# EAGLE board v3 (EAGLE 5.11)
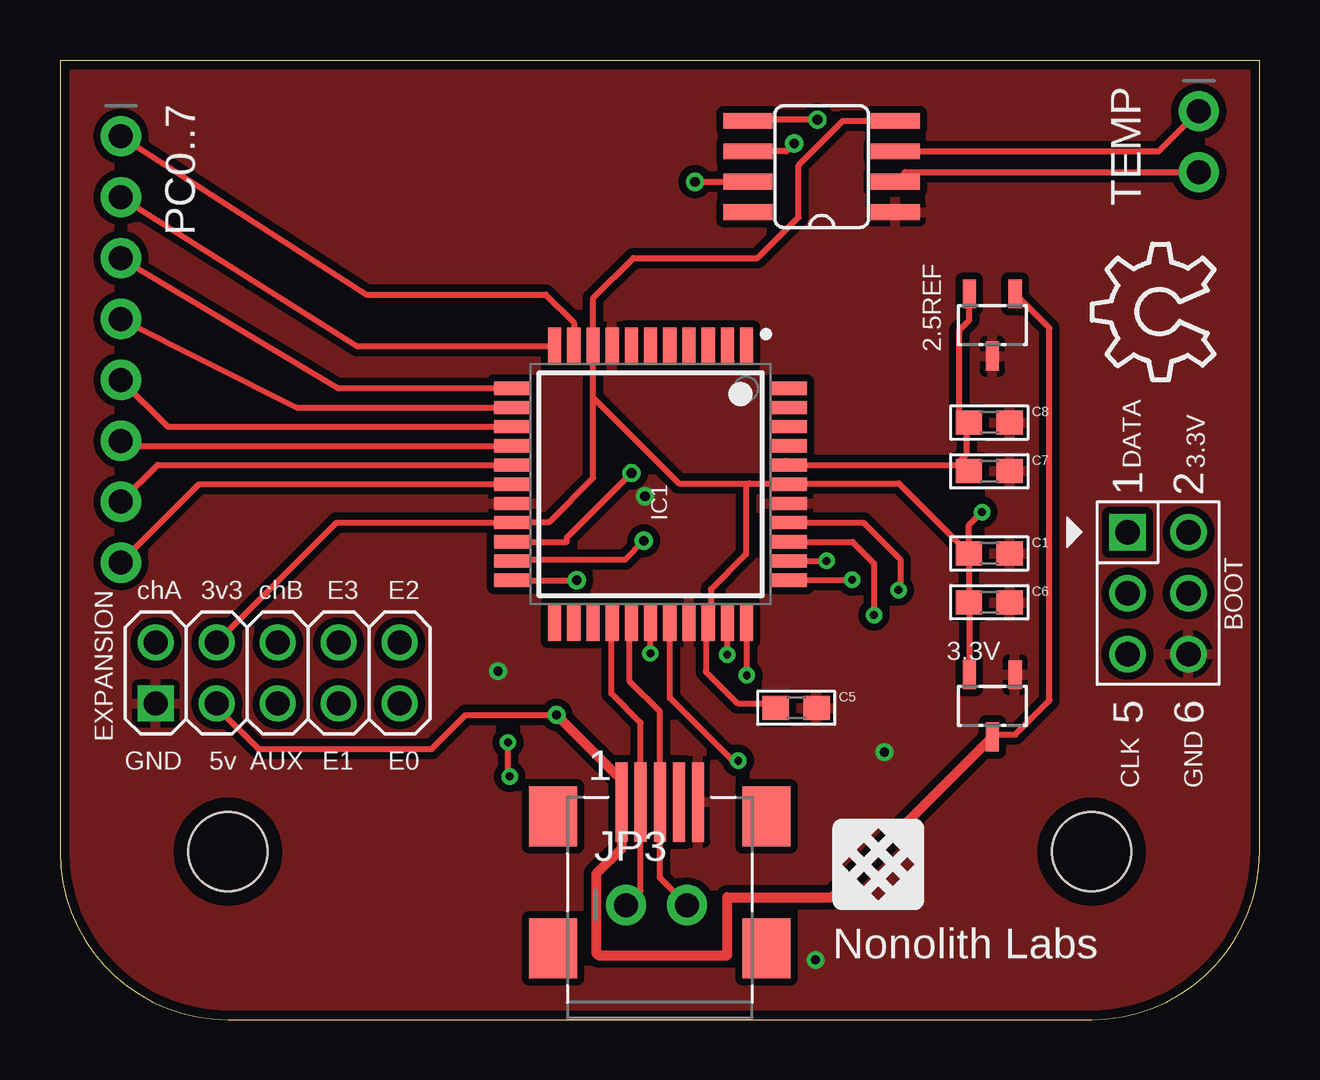
[diagram p0: board, top side]
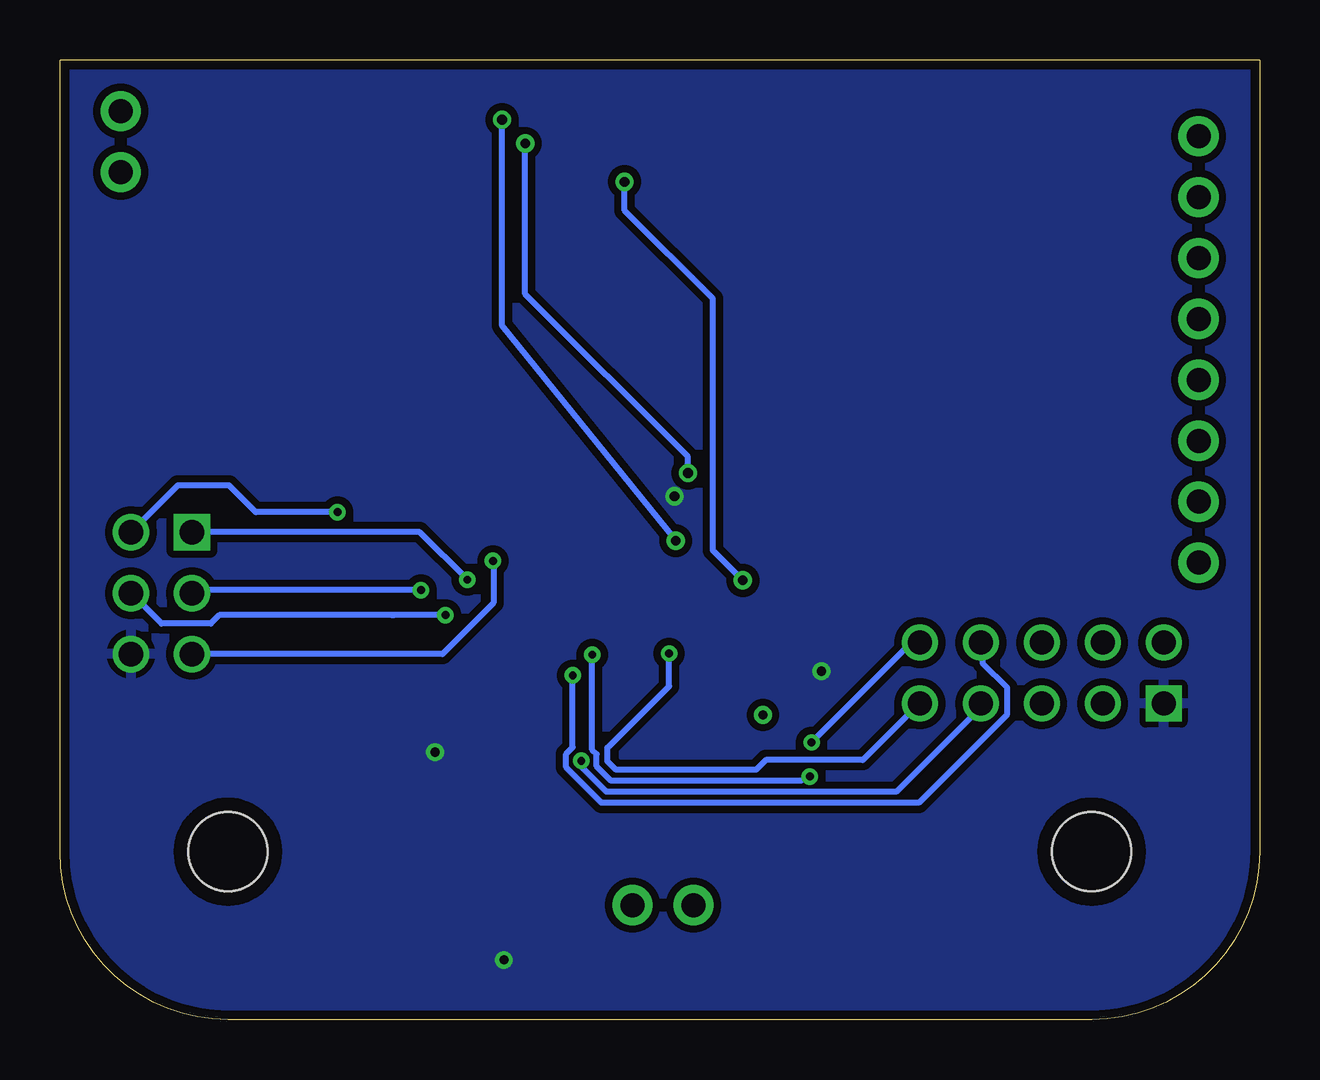
[diagram p1: board, bottom side, seen from below]

Size 50 x 40.01 mm. Coordinates in mm from the lower left corner, seen from the top.
Outline: 43,0 arc90 50,7 50,40.01 0,40.01 0,7 arc90 7,0 43,0
Copper layers (1*16): Top 0.0356mm / dielectric 1.5011mm / Bottom 0.0356mm
Design rules "LaenPCBOrder *": minimum track width 6mil, minimum drill 13mil, track to track 6mil, track to pad 6mil, pad to pad 6mil, via to via 6mil, smd to smd 6mil, copper to edge 15mil, drill to drill 6mil, minimum pad ring 7mil, minimum via ring 7mil, stop-mask expansion 4mil, vias tented up to drill 0mil, thermal gap 10mil
Net classes: 0 default: width 0.254 mm, clearance 0.127 mm

## Footprints (pad centres in the part's own frame; a part is rotated, then mirrored left to right if it is on the bottom)
SOT23-3 = smd 0.55 x 1.2: 1 0.95,1.3; 2 -0.95,1.3; 3 0,-1.3
0603 = smd 1.1 x 1: 1 -0.85,0; 2 0.85,0
2X05 = drill 1 square: 1 -5.08,-1.27 | drill 1 round: 2 -5.08,1.27; 3 -2.54,-1.27; 4 -2.54,1.27; 5 0,-1.27; 6 0,1.27; 7 2.54,-1.27; 8 2.54,1.27; 9 5.08,-1.27; 10 5.08,1.27
TQFP-44 = smd 1.55 x 0.55: 1 -5.75,4; 2 -5.75,3.2; 3 -5.75,2.4; 4 -5.75,1.6; 5 -5.75,0.8; 6 -5.75,0; 7 -5.75,-0.8; 8 -5.75,-1.6; 9 -5.75,-2.4; 10 -5.75,-3.2; 11 -5.75,-4; 23 5.75,-4; 24 5.75,-3.2; 25 5.75,-2.4; 26 5.75,-1.6; 27 5.75,-0.8; 28 5.75,0; 29 5.75,0.8; 30 5.75,1.6; 31 5.75,2.4; 32 5.75,3.2; 33 5.75,4 | smd 0.55 x 1.55: 12 -4,-5.75; 13 -3.2,-5.75; 14 -2.4,-5.75; 15 -1.6,-5.75; 16 -0.8,-5.75; 17 0,-5.75; 18 0.8,-5.75; 19 1.6,-5.75; 20 2.4,-5.75; 21 3.2,-5.75; 22 4,-5.75; 34 4,5.75; 35 3.2,5.75; 36 2.4,5.75; 37 1.6,5.75; 38 0.8,5.75; 39 0,5.75; 40 -0.8,5.75; 41 -1.6,5.75; 42 -2.4,5.75; 43 -3.2,5.75; 44 -4,5.75
1X02_ROUND = drill 1 pad 1.676 round: 1 -1.27,0; 2 1.27,0
1X08_ROUND = drill 1 pad 1.676 round: 1 -8.89,0; 2 -6.35,0; 3 -3.81,0; 4 -1.27,0; 5 1.27,0; 6 3.81,0; 7 6.35,0; 8 8.89,0
HEADER_PRG_2X03 = drill 1.016 square: 1 -2.54,-1.27 | drill 1.016 round: 2 -2.54,1.27; 3 0,-1.27; 4 0,1.27; 5 2.54,-1.27; 6 2.54,1.27
SO-08 = smd 0.66 x 2.032: 1 -1.905,-3.073; 2 -0.635,-3.073; 3 0.635,-3.073; 4 1.905,-3.073; 5 1.905,3.073; 6 0.635,3.073; 7 -0.635,3.073; 8 -1.905,3.073
STAND-OFF = hole 3.302: 0,0
CONN_USB_MINI-B = smd 2 x 2.5: BODY@1 -4.45,2.5; BODY@2 4.45,2.5; BODY@3 4.45,-3; BODY@4 -4.45,-3 | smd 0.5 x 3.3: D+ 0,3.1; D- -0.8,3.1; GND 1.6,3.1; ID 0.8,3.1; VUSB -1.6,3.1

## Placement (x,y rotation side)
2.5REF  [SOT23-3]  38.86,28.96 0 top
3.3V  VREG  [SOT23-3]  38.86,13.08 0 top
C1  .1uF  [0603]  38.73,19.43 0 top
C5  .01uF  [0603]  30.69,13 0 top
C6  1uF  [0603]  38.73,17.4 0 top
C7  1uF  [0603]  38.73,22.86 0 top
C8  .01uF  [0603]  38.73,24.89 0 top
EXPANSION  [2X05]  9.08,14.45 0 top
IC1  [TQFP-44]  24.62,22.32 270 top
JP3  [1X02_ROUND]  24.87,4.78 0 top
OSH  [OSHW_8X200_NOTEXT]  48.11,26.67 90 top
PC0..7  [1X08_ROUND]  2.54,27.94 270 top
PROG  HEADER_PRG_AVR_ICSP  [HEADER_PRG_2X03]  45.77,17.78 270 top
TEMP  [1X02_ROUND]  47.47,36.6 270 top
U$3  [LOGO_NONOLITH]  32.21,4.57 0 top
U$4  MAX31855  [SO-08]  31.75,35.56 90 top
U$8  [STAND-OFF]  7,7 0 top
U$9  [STAND-OFF]  43,7 0 top
USB1  USB-MINI-BUSB1  [CONN_USB_MINI-B]  25,5.97 0 top

## Library data of the parts
2.5REF 3.3V C1 C5-C8 EXPANSION IC1 JP3 PC0..7 TEMP U$3 U$4 USB1 = nonolith
OSH = OSHW
PROG = dp_devices
U$8 U$9 = SparkFun

## Nets
2.5VREF: 2.5REF.2 C7.1 C8.1 IC1.40
3.3V: 3.3V.2 C1.1 C5.1 C6.1 EXPANSION.4 IC1.9 IC1.19 IC1.31 IC1.39 PROG.2 U$4.4
5V: 2.5REF.1 3.3V.3 EXPANSION.3 USB1.VUSB
ADC9: IC1.5
BOOTLOAD: IC1.36 PROG.4
CLK-AUX: EXPANSION.7 IC1.29
CS: IC1.20 U$4.6
CS-AUX: EXPANSION.9 IC1.28
D+: IC1.27 JP3.2 USB1.D+
D-: IC1.26 JP3.1 USB1.D-
DAC0: IC1.6
DAC1: IC1.7
GND: 2.5REF.3 3.3V.1 C1.2 C5.2 C6.2 C7.2 C8.2 EXPANSION.1 IC1.8 IC1.18 IC1.30 IC1.38 PROG.6 U$4.1 USB1.GND
MISO: IC1.22 U$4.7
MISO-AUX: EXPANSION.10 IC1.32
MOSI: IC1.23
MOSI-AUX: EXPANSION.8 IC1.33
N$1: TEMP.1 U$4.3
N$2: TEMP.2 U$4.2
PC0: IC1.10 PC0..7.1
PC1: IC1.11 PC0..7.2
PC2: IC1.12 PC0..7.3
PC3: IC1.13 PC0..7.4
PC4: IC1.14 PC0..7.5
PC5: IC1.15 PC0..7.6
PC6: IC1.16 PC0..7.7
PC7: IC1.17 PC0..7.8
PDI-CLK: IC1.35 PROG.5
PDI-DATA: IC1.34 PROG.1
PR1: IC1.37 PROG.3
SCK: IC1.21 U$4.5

## Tracks (layer width: path | path; a pad name or v marks a point on that pad's centre or on a via)
2.5VREF
  Top 0.254: 30.25,23.29 30.28,23.27 IC1.40 37.37,23.12 37.49,23.16 37.8,22.86 C7.1 37.49,23.27 37.8,23.57 37.8,24.89 C8.1 37.8,24.99 37.49,25.3 37.49,28.75 37.9,29.16 37.9,30.18 2.5REF.2
3.3V  (via drill 0.33)
  Top 0.254: IC1.39 30.18,22.35 28.73,22.35 | C5.1 29.65,13.18 28.25,13.18 26.92,14.5 26.92,16.47 IC1.31 27.11,16.66 27.13,16.66 27.13,17.93 28.6,19.41 28.6,22.23 28.73,22.35 | C1.1 37.87,18.99 | C1.1 37.89,19.44 37.89,20.62 v38.43,21.16 | 3.3V.2 37.9,14.43 37.9,17.37 C6.1 C1.1 | 30.4,22.35 34.96,22.35 C1.1 | EXPANSION.4 11.54,20.72 IC1.19 18.9,20.75 20.4,20.75 22.23,22.58 22.23,25.93 | 28.73,22.35 25.81,22.35 22.23,25.93 | 22.23,25.93 IC1.9 22.23,30.07 23.9,31.75 29.08,31.75 30.79,33.45 30.79,35.61 32.64,37.47 U$4.4
  Top 0.406: IC1.39 30.4,22.35
  Bottom 0.254: v38.43,21.16 41.83,21.16 42.95,22.28 45.09,22.28 PROG.2
5V  (via drill 0.38)
  Top 0.254: EXPANSION.3 6.55,13.16 6.55,13.01 8.28,11.28 15.49,11.28 16.92,12.7 v20.7,12.7 | 39.83,30.18 2.5REF.1 41.25,28.82 41.25,13.31 39.83,11.89 38.91,11.89 3.3V.3 38.81,11.68 | 23.44,10.21 23.44,9.11 USB1.VUSB
  Top 0.406: 23.44,10.21 23.19,10.21 v20.7,12.7 | USB1.VUSB 23.4,7.12 22.35,6.07 22.35,2.77 22.43,2.69 27.81,2.69 27.81,5.11 32.19,5.11 3.3V.3
BOOTLOAD  (via drill 0.33)
  Top 0.254: IC1.36 33.04,19.92 33.93,19.02 v33.93,16.87
  Bottom 0.254: PROG.4 45.77,16.51 43.71,16.51 43.36,16.87 36.17,16.87 36.09,16.87 v33.93,16.87
CLK-AUX  (via drill 0.33)
  Top 0.254: v28.27,10.79 28.25,10.85 27.99,10.85 25.43,13.41 IC1.29
  Bottom 0.254: v28.27,10.79 28.27,10.54 27.23,9.5 15.14,9.5 11.63,13.01 11.63,13.16 EXPANSION.7
CS  (via drill 0.41 pad 0.25, 0.41 pad 0.41)
  Top 0.254: IC1.20 21.13,19.91 21.13,20.09 v23.82,22.78 | v30.61,36.52 30.28,36.2 U$4.6
  Bottom 0.254: v23.82,22.78 23.82,23.47 30.61,30.25 v30.61,36.52
CS-AUX  (via drill 0.33)
  Top 0.254: v24.61,15.27 IC1.28
  Bottom 0.254: v24.61,15.27 24.61,13.89 27.18,11.33 27.18,10.77 26.82,10.41 20.98,10.41 20.57,10.82 16.54,10.82 14.17,13.18 EXPANSION.9
D+
  Top 0.254: 23.75,16.5 23.75,14.1 25,12.85 USB1.D+ 25,5.91 JP3.2
  Top 0.406: 23.75,16.5 IC1.27
D-
  Top 0.254: 22.99,16.54 22.99,13.59 24.2,12.38 USB1.D- 24.2,5.38 JP3.1
  Top 0.406: 22.99,16.54 IC1.26
GND  (via drill 0.38, 0.41 pad 0.25)
  other vias: 34.37,11.15 18.26,14.53 31.5,2.49 24.38,21.82
  pour Bottom (isolate 0.305): 0,40.01 50,40.01 50,0 0,0
  pour Top (isolate 0.305): 0,40.01 50,40.01 50,0 -0.38,-0.13
MISO  (via drill 0.41 pad 0.25, 0.41 pad 0.41)
  Top 0.254: IC1.22 v21.54,18.31 | v26.47,34.92 U$4.7
  Bottom 0.254: v21.54,18.31 22.78,19.56 22.78,30.05 26.47,33.73 v26.47,34.92
MISO-AUX  (via drill 0.33)
  Top 0.254: v27.81,15.21 IC1.32 | v18.67,11.56 18.67,10.21 v18.75,10.13
  Bottom 0.254: v27.81,15.21 27.81,11.25 27.64,11.07 27.64,10.57 27.03,9.96 19.1,9.96 18.92,10.13 v18.75,10.13 | EXPANSION.10 14.51,15.72 v18.67,11.56
MOSI-AUX  (via drill 0.33)
  Top 0.254: v28.63,14.35 IC1.33
  Bottom 0.254: 11.58,15.65 EXPANSION.8 11.53,15.54 11.53,14.86 10.52,13.84 10.52,12.72 14.2,9.04 27.43,9.04 28.91,10.52 28.91,11.07 28.63,11.35 v28.63,14.35
N$1
  Top 0.254: U$4.3 45.8,36.2 TEMP.1
N$2
  Top 0.254: U$4.2 35.23,35.33 TEMP.2
PC0
  Top 0.254: IC1.10 21.42,29.05 20.24,30.23 12.78,30.23 PC0..7.1
PC1
  Top 0.254: IC1.11 12.39,28.07 PC0..7.2
PC2
  Top 0.254: IC1.12 11.6,26.32 PC0..7.3
PC3
  Top 0.254: IC1.13 9.86,25.52 PC0..7.4
PC4
  Top 0.254: IC1.14 4.49,24.72 PC0..7.5
PC5
  Top 0.254: IC1.15 2.75,23.92 PC0..7.6
PC6
  Top 0.254: IC1.16 4.07,23.12 PC0..7.7
PC7
  Top 0.254: IC1.17 5.81,22.32 PC0..7.8
PDI-CLK  (via drill 0.33)
  Top 0.254: v31.95,19.13 IC1.35
  Bottom 0.254: PROG.5 34.06,15.24 31.93,17.37 31.93,19.1 v31.95,19.13
PDI-DATA  (via drill 0.33)
  Top 0.254: IC1.34 33,18.32 v33.02,18.34
  Bottom 0.254: v33.02,18.34 35,20.32 PROG.1
PR1  (via drill 0.33)
  Top 0.254: IC1.37 33.48,20.72 35.03,19.18 35.03,17.98 v34.95,17.91
  Bottom 0.254: v34.95,17.91 44.37,17.91 PROG.3
SCK  (via drill 0.41 pad 0.25, 0.41 pad 0.41)
  Top 0.254: IC1.21 18.93,19.18 23.55,19.18 v24.33,19.96 | U$4.5 28.73,37.52 v31.57,37.52
  Bottom 0.254: v24.33,19.96 31.57,28.93 v31.57,37.52

## Text on the board
tNames: DATA | 3.3V | chA | 3v3 | chB | E3 | E2 | BOOT | EXPANSION | GND | 5v | AUX | E1 | E0 | CLK | GND | Nonolith Labs